# Altium PCB 封装.PcbDoc
Units mil, origin at the board's own origin, x right, y up, seen from the top; angles counter-clockwise.
Board outline 6000 x 4000 mil, 2 copper layers (Top Layer, Bottom Layer); 3 components, 0 nets, 70 pads, 0 vias.
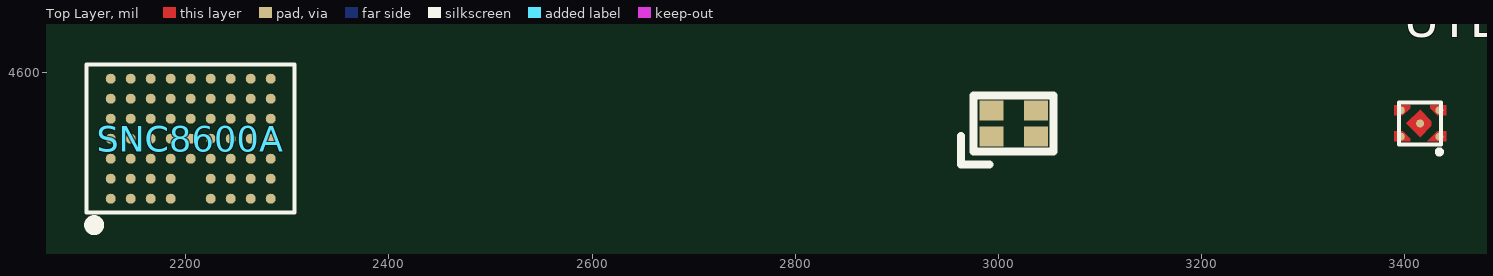
[diagram p0: Top Layer view]
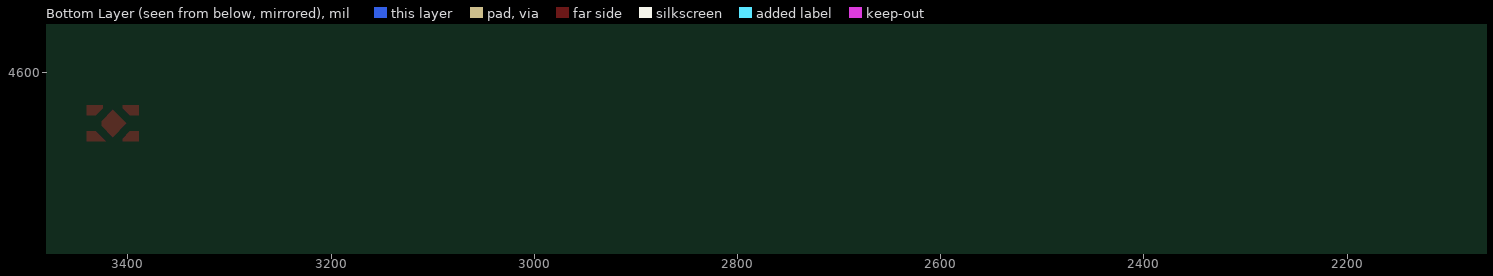
[diagram p1: Bottom Layer view, seen from below]

## Layer stack, top to bottom
Top Solder: solder mask 0.4, Solder Resist, Dk 3.5
Top Layer: signal copper 1.4
Dielectric 1: dielectric 12.6, FR-4, Dk 4.8
Bottom Layer: signal copper 1.4
Bottom Solder: solder mask 0.4, Solder Resist, Dk 3.5

## Board outline
1000,1000 7000,1000 7000,5000 1000,5000

## Design rules (kind name [scope] priority, off if disabled: settings)
Clearance [All] p1: gap=10
PolygonConnect [All] p1: connectstyle=Relief reliefconductorwidth=10 reliefentries=4 polygonreliefangle="90 Angle" airgapwidth=10
RoutingVias [All] p1: holewidth=28 width=50 viastyle="Through Hole" minholewidth=28 minwidth=50 maxholewidth=28 maxwidth=50
SolderMaskExpansion [All] p1: expansion=4
UnpouredPolygon [All] p1: allowunpoured=FALSE
Width [All] p1: maxlimit=10 minlimit=10 preferedwidth=10
29 further rules are at their usual default settings.

## Components (designator, comment, footprint, x,y, rotation, side; value= is the part's Value field where it differs from the comment)
"SF1612 晶振" "Comment" SF1612 3015,4550 r0 top
SNC8600A "Comment" BGA63C50P9X7_500X350X100 2205,4535 r0 top
UTDFN-1X1-4 "Comment" UTDFN-1X1-4 3415,4550 r0 top

## Footprints (in the part's own frame and the unit in brackets; to place one, negate y for a bottom-side part, rotate by r counter-clockwise, add the part's x,y. Pads: shape width x height; smd on the part's side, far side on the other; paste and mask are expansions set on the pad)
BGA63C50P9X7_500X350X100 [mm] "BGA, 63-Leads, Body 5.00x3.50mmx1.00mm, Pitch 0.50mm"
  round 0.25 smd: A1(-2,-1.5) A2(-1.5,-1.5) A3(-1,-1.5) A4(-0.5,-1.5) A6(0.5,-1.5) A7(1,-1.5) A8(1.5,-1.5) A9(2,-1.5) B1(-2,-1) B2(-1.5,-1) B3(-1,-1) B4(-0.5,-1) B6(0.5,-1) B7(1,-1) B8(1.5,-1) B9(2,-1) C1(-2,-0.5) C2(-1.5,-0.5) C3(-1,-0.5) C4(-0.5,-0.5) C5(0,-0.5) C6(0.5,-0.5) C7(1,-0.5) C8(1.5,-0.5) C9(2,-0.5) D1(-2,0) D2(-1.5,0) D3(-1,0) D4(-0.5,0) D5(0,0) D6(0.5,0) D7(1,0) D8(1.5,0) D9(2,0) E1(-2,0.5) E2(-1.5,0.5) E3(-1,0.5) E4(-0.5,0.5) E5(0,0.5) E6(0.5,0.5) E7(1,0.5) E8(1.5,0.5) E9(2,0.5) F1(-2,1) F2(-1.5,1) F3(-1,1) F4(-0.5,1) F5(0,1) F6(0.5,1) F7(1,1) F8(1.5,1) F9(2,1) G1(-2,1.5) G2(-1.5,1.5) G3(-1,1.5) G4(-0.5,1.5) G5(0,1.5) G6(0.5,1.5) G7(1,1.5) G8(1.5,1.5) G9(2,1.5)
  silkscreen extent -2.6,-2.28 2.6,1.85, body extent -2.5,-1.75 2.5,1.75, height 1
SF1612 [mm]
  rect 0.6x0.5 smd: 1(-0.56,-0.33) 2(0.56,-0.33) 3(0.56,0.33) 4(-0.56,0.33)
  silkscreen extent -1.32,-1.02 1,0.7
UTDFN-1X1-4 [mm]
  round 0.2 smd mask+0: 1(0.483,-0.33) 2(0.483,0.33) 3(-0.483,0.33) 4(-0.483,-0.33) 5(0,0)
  Top Layer region: 0,-0.339 -0.339,0 0,0.339 0.279,0.06 0.279,-0.06
  Top Layer region: -0.25,-0.45 -0.65,-0.45 -0.65,-0.2 -0.43,-0.2 -0.25,-0.38
  Top Layer region: -0.25,0.38 -0.43,0.2 -0.65,0.2 -0.65,0.45 -0.25,0.45
  Top Layer region: 0.65,-0.45 0.18,-0.45 0.43,-0.2 0.65,-0.2
  Top Layer region: 0.65,0.2 0.43,0.2 0.25,0.38 0.25,0.45 0.65,0.45
  silkscreen extent -0.53,-0.76 0.53,0.53, body extent -0.57,-0.53 0.57,0.52, height 0.59

## Nets (pads, with @x,y where several pads share a name; then routed paths per layer and width w, separated by ;. In a path a pad name is that pad's centre, name@x,y a point inside that pad or via, vN(x,y) a via of type N, cw(c..) or ccw(c..) an arc to the next point about the centre after c; other vN are vias at no path point)
pads on no net: "SF1612 晶振.1" "SF1612 晶振.2" "SF1612 晶振.3" "SF1612 晶振.4" SNC8600A.A1 SNC8600A.A2 SNC8600A.A3 SNC8600A.A4 SNC8600A.A6 SNC8600A.A7 SNC8600A.A8 SNC8600A.A9 SNC8600A.B1 SNC8600A.B2 SNC8600A.B3 SNC8600A.B4 SNC8600A.B6 SNC8600A.B7 SNC8600A.B8 SNC8600A.B9 SNC8600A.C1 SNC8600A.C2 SNC8600A.C3 SNC8600A.C4 SNC8600A.C5 SNC8600A.C6 SNC8600A.C7 SNC8600A.C8 SNC8600A.C9 SNC8600A.D1 SNC8600A.D2 SNC8600A.D3 SNC8600A.D4 SNC8600A.D5 SNC8600A.D6 SNC8600A.D7 SNC8600A.D8 SNC8600A.D9 SNC8600A.E1 SNC8600A.E2 SNC8600A.E3 SNC8600A.E4 SNC8600A.E5 SNC8600A.E6 SNC8600A.E7 SNC8600A.E8 SNC8600A.E9 SNC8600A.F1 SNC8600A.F2 SNC8600A.F3 SNC8600A.F4 SNC8600A.F5 SNC8600A.F6 SNC8600A.F7 SNC8600A.F8 SNC8600A.F9 SNC8600A.G1 SNC8600A.G2 SNC8600A.G3 SNC8600A.G4 SNC8600A.G5 SNC8600A.G6 SNC8600A.G7 SNC8600A.G8 SNC8600A.G9 UTDFN-1X1-4.1 UTDFN-1X1-4.2 UTDFN-1X1-4.3 UTDFN-1X1-4.4 UTDFN-1X1-4.5